# Altium PCB UmbilicalBoardV5.PcbDoc
Units mm, origin at the board's own origin, x right, y up, seen from the top; angles counter-clockwise.
Board outline 88.77 x 92.99 mm, 4 copper layers (Top Layer, GndPlane, PowerPlane, Bottom Layer), stack 0.107 mm thick; 24 components, 59 nets, 217 pads, 20 vias.
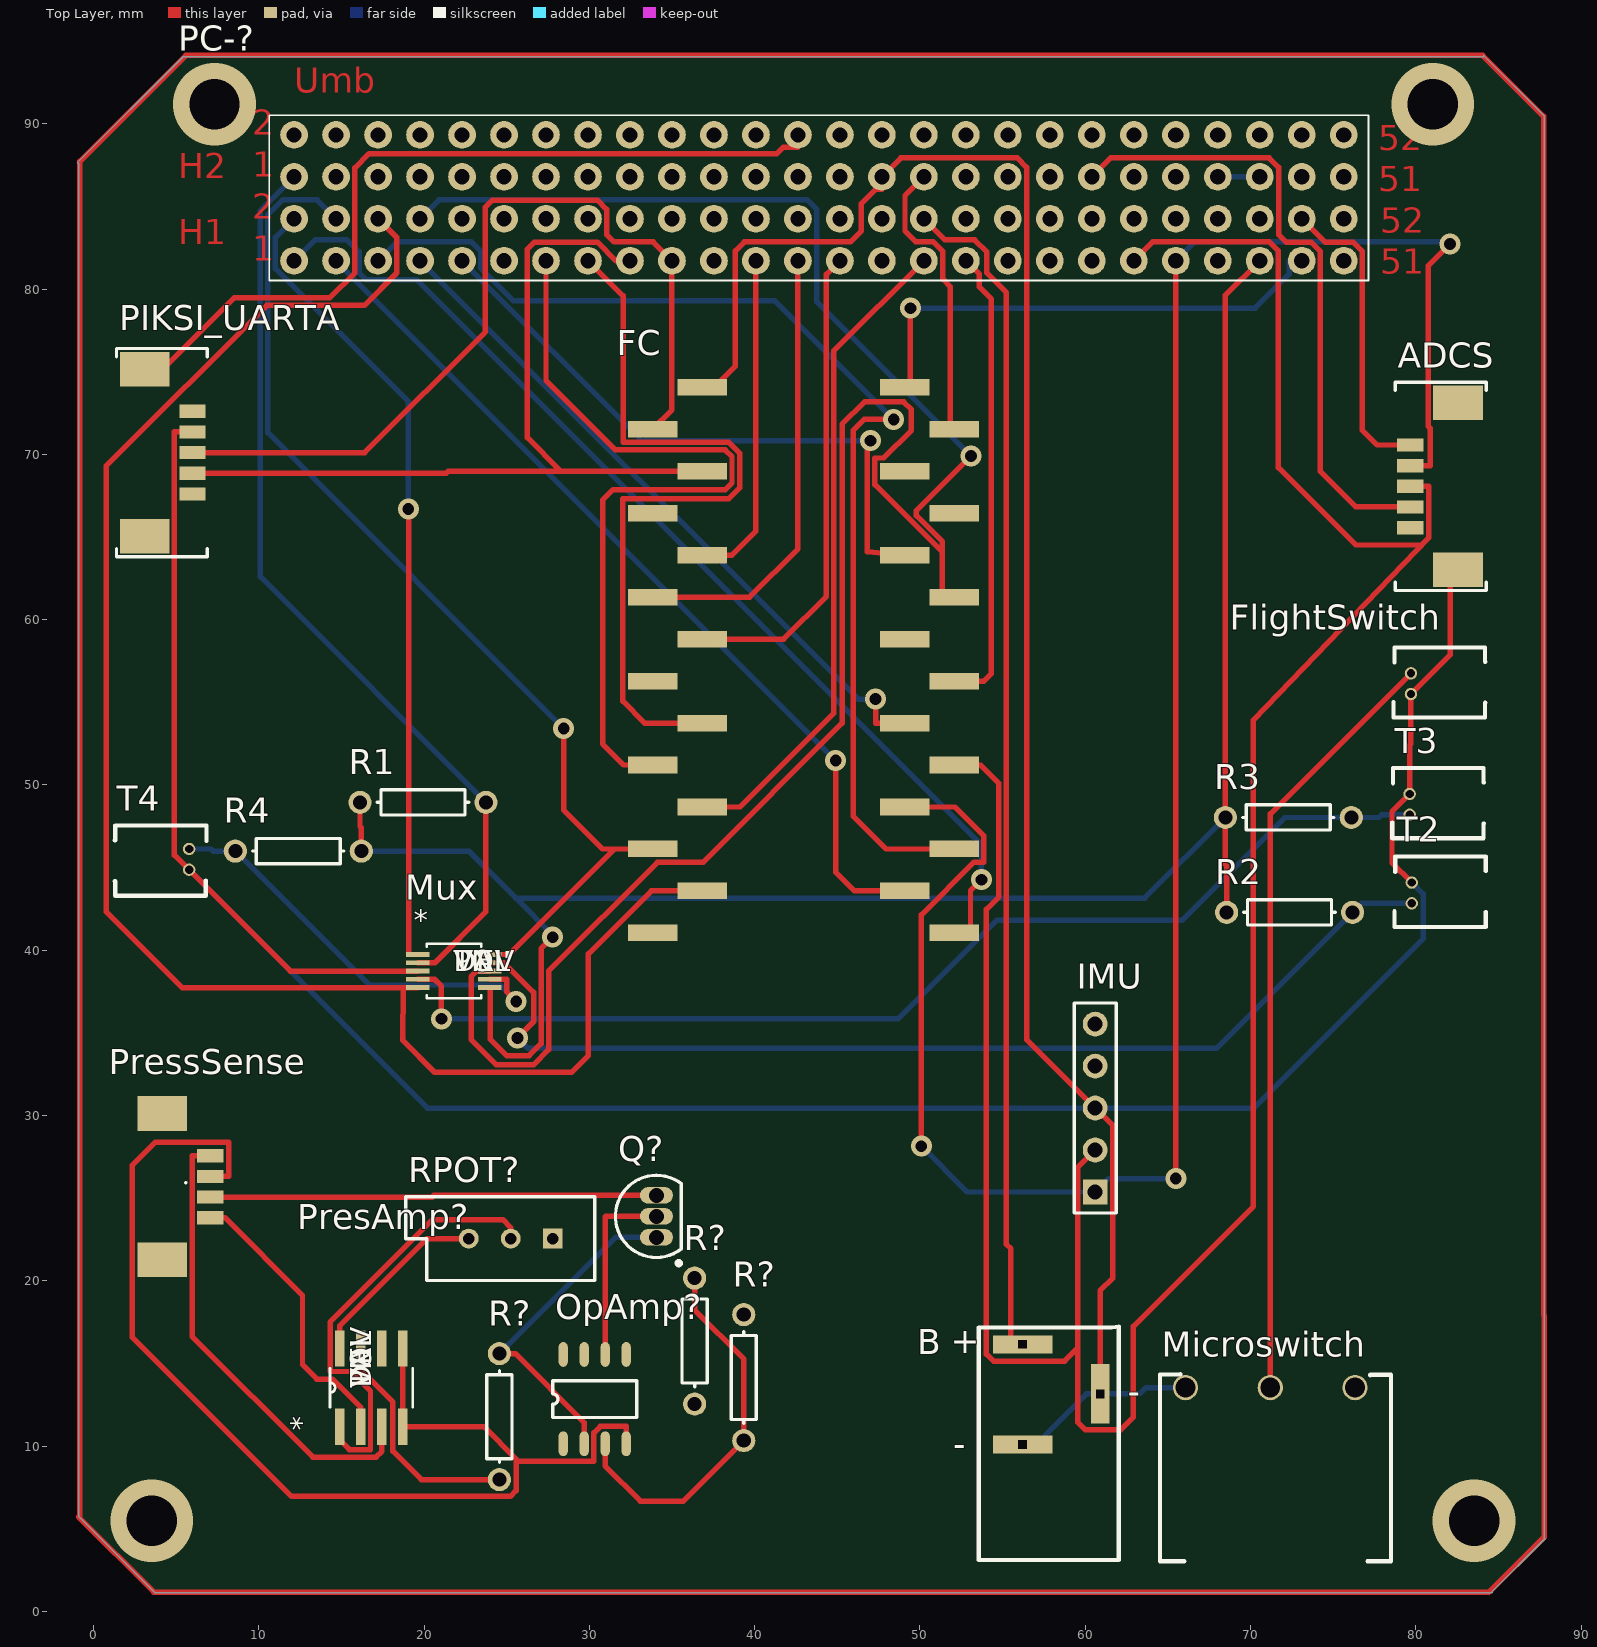
[diagram p0: Top Layer view]
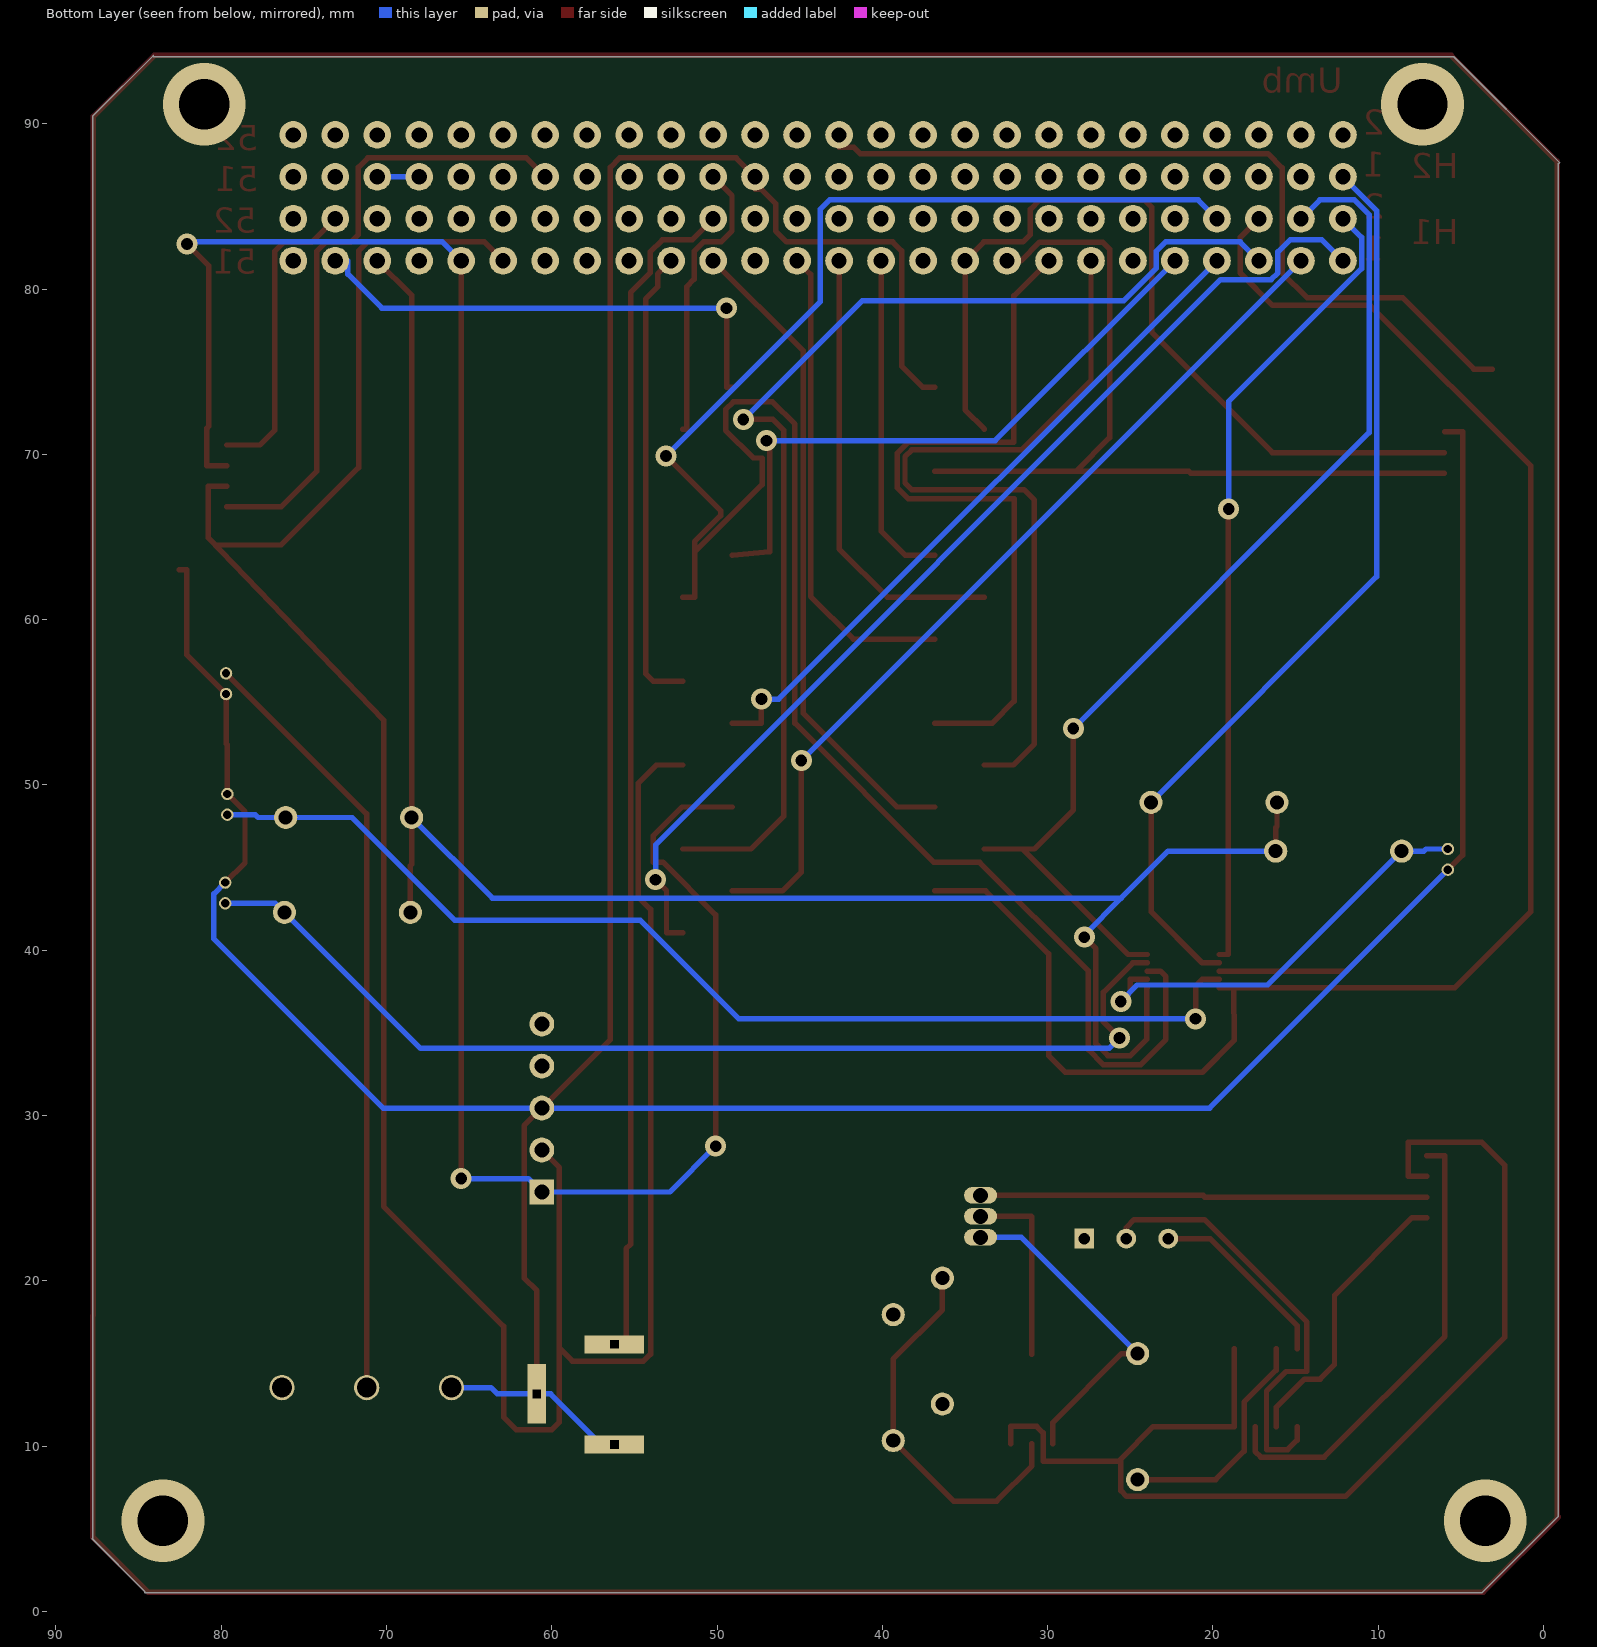
[diagram p1: Bottom Layer view, seen from below]
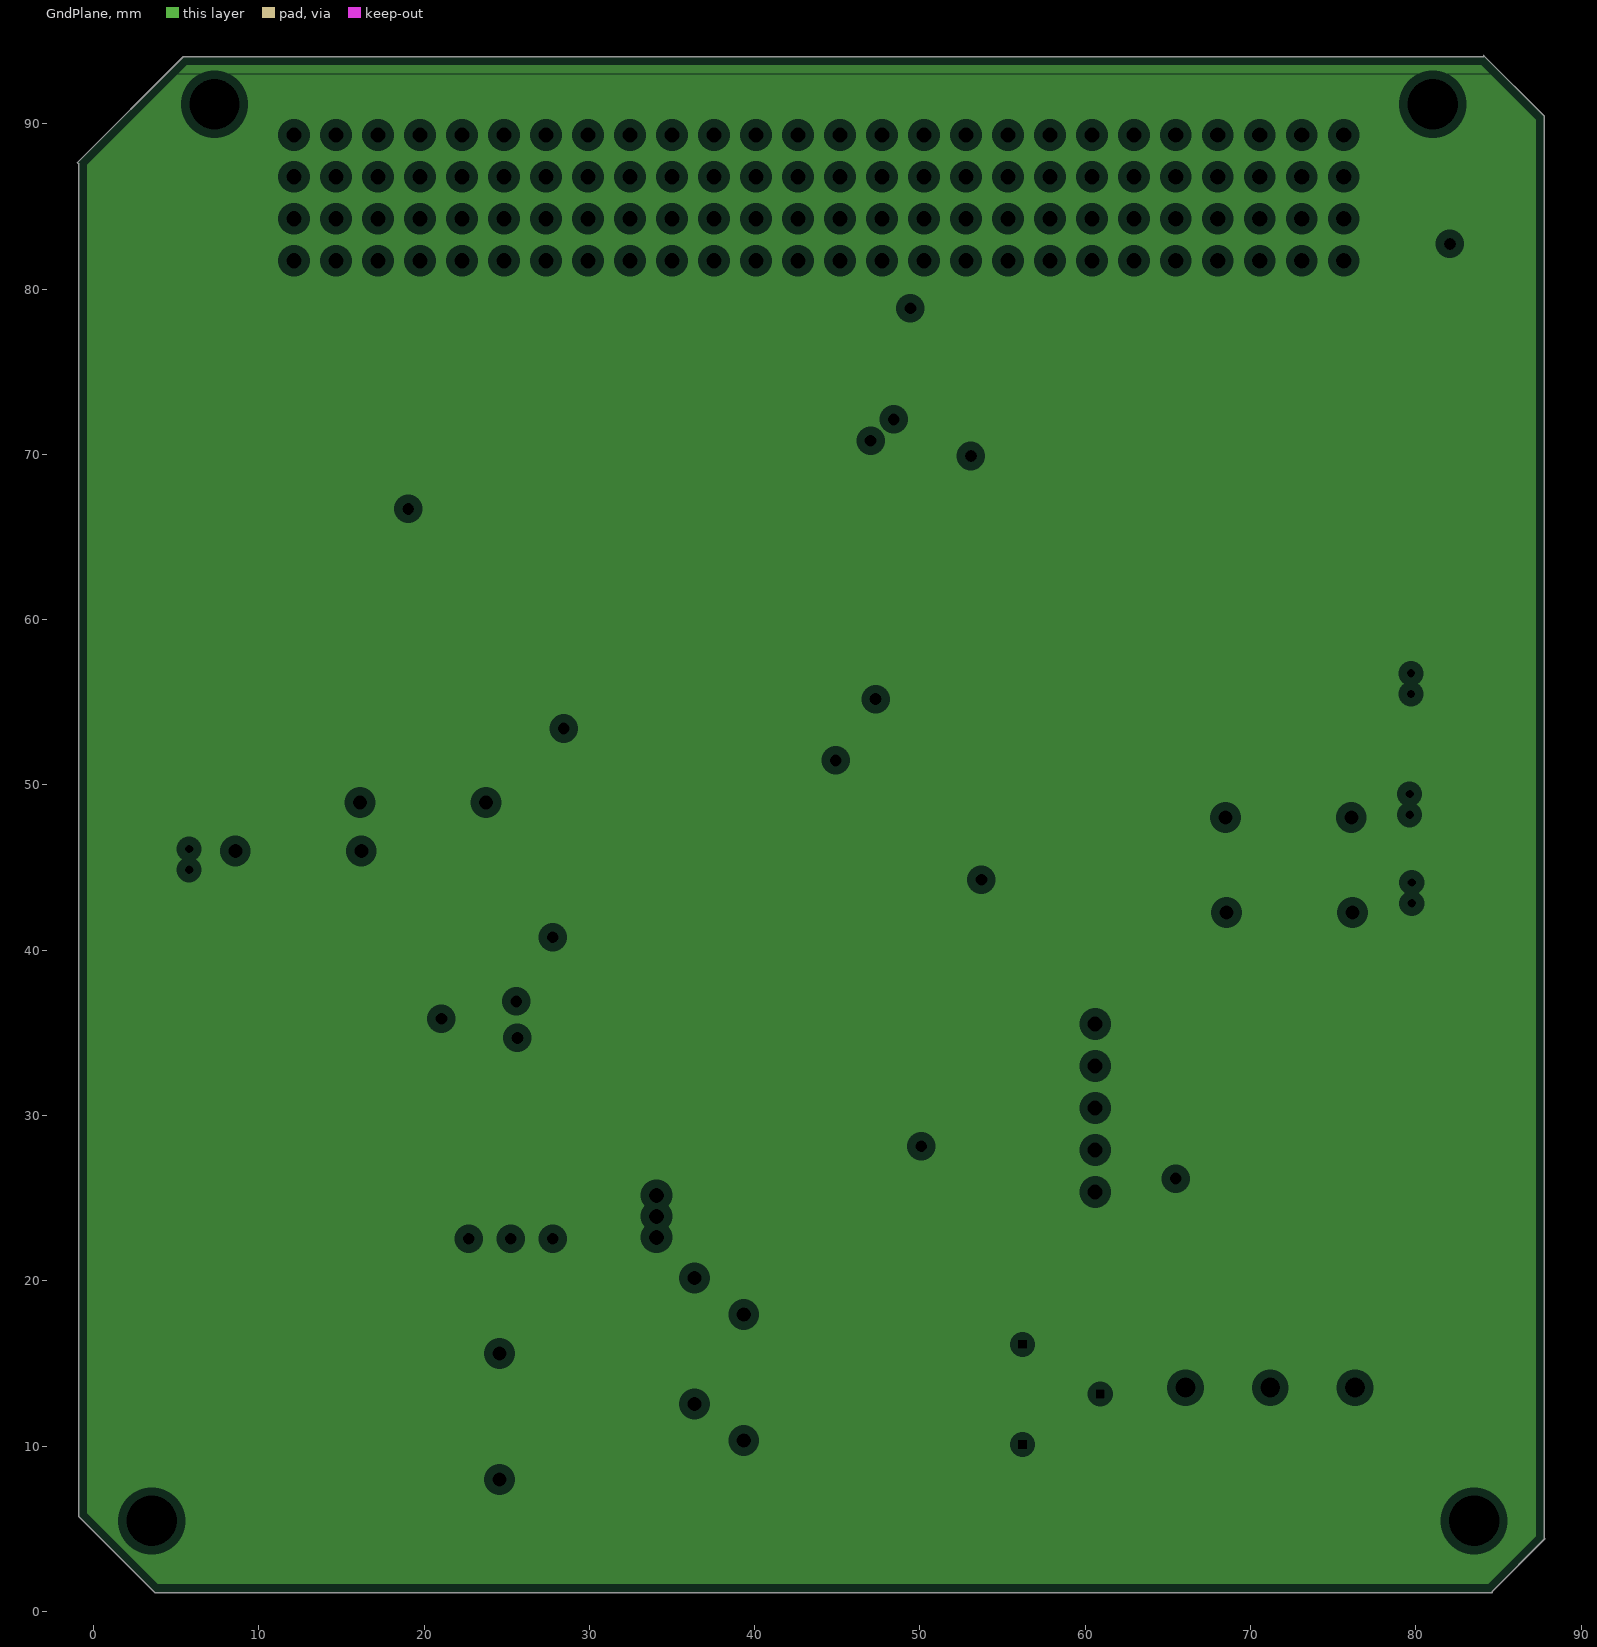
[diagram p2: GndPlane, clearances drawn from the general rule]
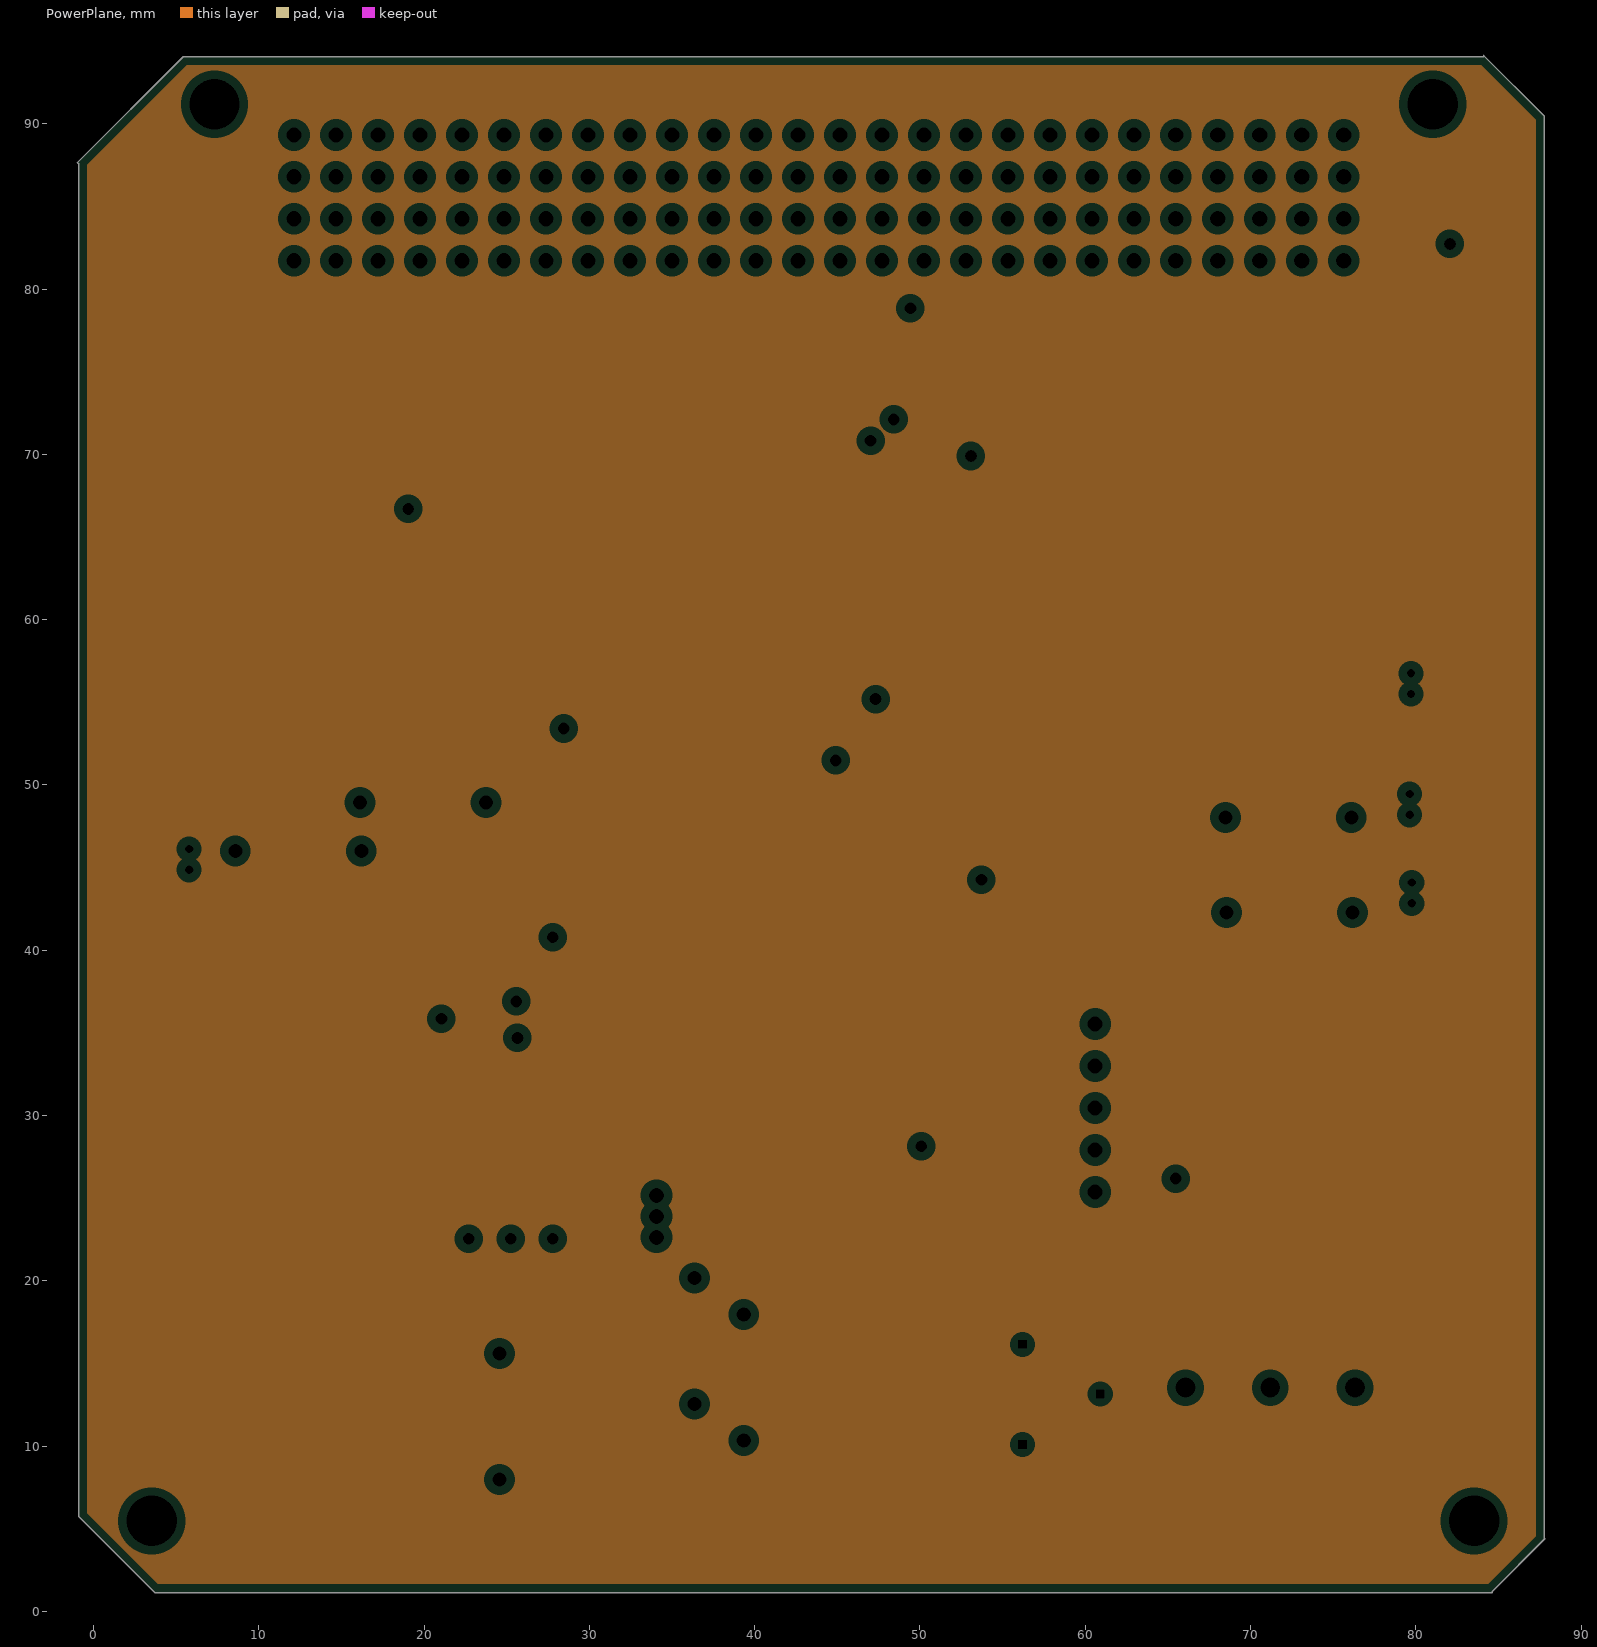
[diagram p3: PowerPlane, clearances drawn from the general rule]

## Layer stack, top to bottom
Top Solder: solder mask 0.0102, Solder Resist, Dk 3.5
Top Layer: signal copper 0.0356
GndPlane: plane copper 0.0178
PowerPlane: plane copper 0.0178
Bottom Layer: signal copper 0.0356
Bottom Solder: solder mask 0.0102, Solder Resist, Dk 3.5

## Board outline
84.099,94.132 87.782,90.449 87.782,4.42 87.808,4.394 84.633,1.219 84.633,1.143 3.708,1.143 -0.889,5.74 -0.889,87.579 -0.965,87.655 5.436,94.056 84.099,94.056

## Design rules (kind name [scope] priority, off if disabled: settings)
Clearance [All] p1: gap=0.254 ignorepadtopadclearanceinfootprint=FALSE except(0: Arc-Hole Track-Hole SMDPad-Hole THPad-Hole Via-Hole Fill-Hole Poly-Hole Region-Hole Text-Hole; 0.127: Track-Track Track-SMDPad Track-THPad SMDPad-SMDPad SMDPad-THPad THPad-THPad)
HoleSize [All] p1: absolutevalues=TRUE maxlimit=3.048 minlimit=0.025 maxpercent=80.000 minpercent=20.000
MinimumSolderMaskSliver [All] p1: minsoldermaskwidth=0.127
PlaneClearance [All] p1: clearance=0.508
PlaneConnect [All] p1: planeconnectstyle=Direct reliefexpansion=0.508 reliefentries=4 reliefconductorwidth=0.254 reliefairgap=0.254
PolygonConnect [All] p1: connectstyle=Direct reliefconductorwidth=0.254 reliefentries=4 polygonreliefangle="90 Angle" airgapwidth=0.254
RoutingVias [All] p1: holewidth=0.711 width=1.27 viastyle="Through Hole" minholewidth=0.711 minwidth=1.27 maxholewidth=0.711 maxwidth=1.27
SilkToSolderMaskClearance [IsPad] p1: minsilkscreentomaskgap=0.05 clearancetoexposedcopper=TRUE
SolderMaskExpansion [All] p1: expansion=0.102
Width [All] p1: maxlimit=0.559 minlimit=0.305 preferedwidth=0.33
25 further rules are at their usual default settings.

## Components (designator, comment, footprint, x,y, rotation, side; value= is the part's Value field where it differs from the comment)
ADCS "ADCS" "Molex Picoblade 5 Pin" 84.054,61.967 r90 top
B "Barrel_Jack" Barrel_Jack 56.209,10.107 r0 top
FC "Teensy 3.2 Headers" "Teensy 3.2 SMD Headers" 33.833,74.066 r0 top
FlightSwitch "RemoverBeforeFlightSwitch" "RemoverBeforeFlight Switch" 79.705,53.549 r90 top
IMU "Header 5" HDR1X5 60.604,25.375 r90 top
Microswitch "MicroSwitch" MicroSwitch_3pin 71.246,13.588 r180 top
Mux "MAX4634EUB+T" 21-0061L 21.806,38.743 r0 top value=Value
OpAmp? "UA741" UA741 28.423,10.145 r90 top
PC-? "PC-104" PC-104FOOTPRINT 12.141,81.712 r0 top
PIKSI_UARTA "PIKSI_UART Connector" "Molex Picoblade 5 Pin" 1.594,76.204 r270 top
PresAmp? "AD627ARZ" R_8 16.815,13.538 r90 top value=Value
PressSense "Connector 4POS Molex PicoBlade" 532610471 7.061,23.82 r0 top
Q? "2N3906" TO-92A 34.061,23.901 r0 top
R1 "Resistor" AXIAL-0.3 19.939,48.946 r0 top value=1K
R2 "Resistor" AXIAL-0.3 72.365,42.291 r0 top value=1K
R3 "Resistor" AXIAL-0.3 72.288,48.031 r0 top value=1K
R4 "Resistor" AXIAL-0.3 12.395,45.999 r180 top value=1K
R? "1000" AXIAL-0.3 39.345,14.148 r90 top value=Res
R? "1000" AXIAL-0.3 36.373,16.358 r90 top value=Res
R? "1000" AXIAL-0.3 24.562,11.786 r90 top value=Res
RPOT? "100K" VR5 25.248,22.555 r180 top value=1K
T2 "TempSensor1" "RemoverBeforeFlight Switch" 79.756,40.889 r90 top
T3 "TempSensor1" "RemoverBeforeFlight Switch" 79.629,46.249 r90 top
T4 "TempSensor2" "RemoverBeforeFlight Switch" 5.791,48.076 r270 top

## Footprints (in the part's own frame and the unit in brackets; to place one, negate y for a bottom-side part, rotate by r counter-clockwise, add the part's x,y. Pads: shape width x height; smd on the part's side, far side on the other; paste and mask are expansions set on the pad)
21-0061L [mil]
  rect 56x11 smd: 1(-85.5,39.37) 2(-85.5,19.69) 3(-85.5,0) 4(-85.5,-19.68) 5(-85.5,-39.37) 6(85.5,-39.37) 7(85.5,-19.68) 8(85.5,0) 9(85.5,19.69) 10(85.5,39.37)
  silkscreen extent -65,-65 134,65, body extent 0,0 10,10, height 10
532610471 [mm] "Connector 4POS Molex PicoBlade"
  rect 1.6x0.8 smd: 1(0,3.75) 2(0,2.5) 3(0,1.25) 4(0,0)
  rect 3x2.1 smd: ""(-2.9,-2.55) ""(-2.9,6.3)
  silkscreen extent -1.52,2.07 -1.42,2.17, body extent -4.71,-3.81 1.02,7.56, height 0.6
AXIAL-0.3 [mm] "Axial Device, Thru-Hole; 2 Leads; 0.3 in Pin Spacing"
  round 1.4 hole 0.85: 1(-3.81,0) 2(3.81,0)
  silkscreen extent -2.77,-0.76 2.77,0.76
Barrel_Jack [mm] "KLDX-0202-B"
  rect 3.6x1.1 hole 0.5 square: 0(0,0) 2(0,6.05)
  rect 1.1x3.6 hole 0.5 square: 1(4.7,3.05)
  silkscreen extent -2.65,-7 5.83,7.12
HDR1X5 [mm] "Connector; Header; 5 Position"
  rect 1.5x1.5 hole 0.9: 1(0,0)
  round 1.5 hole 0.9: 2(2.54,0) 3(5.08,0) 4(7.62,0) 5(10.16,0)
  silkscreen extent -1.27,-1.27 11.43,1.27
MicroSwitch_3pin [mm] "Omron Electronics Inc-EMC Div D2FS-FL-N-A1"
  round 1.524 hole 1.2: 1(-5.08,0.05) 2(0.05,0.05) 3(5.18,0.05)
  silkscreen extent -7.25,-0.77 6.73,10.55, body extent -7.25,-0.75 6.73,10.55
"Molex Picoblade 5 Pin" [mm] "Molex Picoblade Header, SMT, Right Angle  53261-0571"
  rect 0.8x1.6 smd: 0(3.6,4.4) 1(4.85,4.4) 2(6.1,4.4) 3(7.35,4.4) 4(8.6,4.4)
  rect 2.1x3 smd: 5(1.05,1.5) 6(11.15,1.5)
  silkscreen extent -0.2,-0.2 12.4,5.3, body extent 0.4,0 11.8,5.2, height 3.4
PC-104FOOTPRINT [mm]
  round 1.676 hole 0.914 mask+0.076: H1_1(0,0) H1_2(0,2.54) H1_3(2.54,0) H1_4(2.54,2.54) H1_5(5.08,0) H1_6(5.08,2.54) H1_7(7.62,0) H1_8(7.62,2.54) H1_9(10.16,0) H1_10(10.16,2.54) H1_11(12.7,0) H1_12(12.7,2.54) H1_13(15.24,0) H1_14(15.24,2.54) H1_15(17.78,0) H1_16(17.78,2.54) H1_17(20.32,0) H1_18(20.32,2.54) H1_19(22.86,0) H1_20(22.86,2.54) H1_21(25.4,0) H1_22(25.4,2.54) H1_23(27.94,0) H1_24(27.94,2.54) H1_25(30.48,0) H1_26(30.48,2.54) H1_27(33.02,0) H1_28(33.02,2.54) H1_29(35.56,0) H1_30(35.56,2.54) H1_31(38.1,0) H1_32(38.1,2.54) H1_33(40.64,0) H1_34(40.64,2.54) H1_35(43.18,0) H1_36(43.18,2.54) H1_37(45.72,0) H1_38(45.72,2.54) H1_39(48.26,0) H1_40(48.26,2.54) H1_41(50.8,0) H1_42(50.8,2.54) H1_43(53.34,0) H1_44(53.34,2.54) H1_45(55.88,0) H1_46(55.88,2.54) H1_47(58.42,0) H1_48(58.42,2.54) H1_49(60.96,0) H1_50(60.96,2.54) H1_51(63.5,0) H1_52(63.5,2.54) H2_1(0,5.08) H2_2(0,7.62) H2_3(2.54,5.08) H2_4(2.54,7.62) H2_5(5.08,5.08) H2_6(5.08,7.62) H2_7(7.62,5.08) H2_8(7.62,7.62) H2_9(10.16,5.08) H2_10(10.16,7.62) H2_11(12.7,5.08) H2_12(12.7,7.62) H2_13(15.24,5.08) H2_14(15.24,7.62) H2_15(17.78,5.08) H2_16(17.78,7.62) H2_17(20.32,5.08) H2_18(20.32,7.62) H2_19(22.86,5.08) H2_20(22.86,7.62) H2_21(25.4,5.08) H2_22(25.4,7.62) H2_23(27.94,5.08) H2_24(27.94,7.62) H2_25(30.48,5.08) H2_26(30.48,7.62) H2_27(33.02,5.08) H2_28(33.02,7.62) H2_29(35.56,5.08) H2_30(35.56,7.62) H2_31(38.1,5.08) H2_32(38.1,7.62) H2_33(40.64,5.08) H2_34(40.64,7.62) H2_35(43.18,5.08) H2_36(43.18,7.62) H2_37(45.72,5.08) H2_38(45.72,7.62) H2_39(48.26,5.08) H2_40(48.26,7.62) H2_41(50.8,5.08) H2_42(50.8,7.62) H2_43(53.34,5.08) H2_44(53.34,7.62) H2_45(55.88,5.08) H2_46(55.88,7.62) H2_47(58.42,5.08) H2_48(58.42,7.62) H2_49(60.96,5.08) H2_50(60.96,7.62) H2_51(63.5,5.08) H2_52(63.5,7.62)
  silkscreen extent -1.5,-1.19 65,8.81
R_8 [mil]
  rect 86x22 smd: 1(-93,75) 2(-93,25) 3(-93,-25) 4(-93,-75) 5(93,-75) 6(93,-25) 7(93,25) 8(93,75)
  silkscreen extent -46,-99 46,98
"RemoverBeforeFlight Switch" [mm] "Molex Picoblade Part Number: 53048-0210"
  round 0.75 hole 0.5: 1(1.95,0) 2(3.205,0)
  silkscreen extent 0.53,-4.5 4.78,1.05, body extent 0.53,-4.47 4.78,1.03, height 4.05
"Teensy 3.2 SMD Headers" [mm]
  rect 3x1 smd: 1(3,0) 2(0,-2.54) 3(3,-5.08) 4(0,-7.62) 5(3,-10.16) 6(0,-12.7) 7(3,-15.24) 8(0,-17.78) 9(3,-20.32) 10(0,-22.86) 11(3,-25.4) 12(0,-27.94) 13(3,-30.48) 14(0,-33.02) 20(18.24,-33.02) 21(15.24,-30.48) 22(18.24,-27.94) 23(15.24,-25.4) 24(18.24,-22.86) 25(15.24,-20.32) 26(18.24,-17.78) 27(15.24,-15.24) 28(18.24,-12.7) 29(15.24,-10.16) 30(18.24,-7.62) 31(15.24,-5.08) 32(18.24,-2.54) 33(15.24,0)
  body extent -1.09,-34.49 19.35,1.16, height 0.25
TO-92A [mm] "TO, Flat Index; 3 In-Line, Axial Leads; Body Dia. 4.5mm; Leads 0.51 x 0.48 mm (max)"
  oval 2x1 hole 0.9: 1(0,-1.27) 2(0,0) 3(0,1.27)
  silkscreen extent -2.48,-2.95 1.5,2.48, body extent -2.48,-2.5 1.5,2.5, height 6.86
UA741 [mm]
  oval 1.5x0.55 smd: 1(0,0) 2(0,-1.27) 3(0,-2.54) 4(0,-3.81) 5(5.4,-3.81) 6(5.4,-2.54) 7(5.4,-1.27) 8(5.4,0)
  silkscreen extent 1.59,-4.45 3.81,0.64
VR5 [mm] "Thru-Hole; 3 Leads"
  rect 1.2x1.2 hole 0.7: 1(-2.54,0)
  round 1.2 hole 0.7: 2(0,0) 3(2.54,0)
  silkscreen extent -5.08,-2.54 6.35,2.54

## Part data
ADCS: library part "PIKSI_UART Connector", "Molex Picoblade 53261-0571"
FlightSwitch: "53048-0210 Molex Picoblade"
IMU: "Header, 5-Pin", LatestRevisionDate=17-Jul-2002, LatestRevisionNote="Re-released for DXP Platform.", Publisher="Altium Limited"
Microswitch: "Omron Electronics Inc-EMC Div D2FS-FL-N-A1"
Mux PresAmp?: "Imported", Type=Type
  Mux: C="Copyright (C) 2015 Accelerated Designs. All rights reserved", Manufacturer_Part_Number=MAX4634EUB+T, RefDes=RefDes, Vendor="Maxim Integrated Products"
  PresAmp?: Manufacturer_Part_Number=AD627ARZ, RefDes=Refdes, Vendor=Vendor
PC-?: "ESQ-126-14-G-D (2 total needed)"
PIKSI_UARTA: "Molex Picoblade 53261-0571"
PressSense: library part 532610471
Q?: "PNP General Purpose Amplifier", ComponentLink1Description="Manufacturer Link", ComponentLink1URL=http://www.fairchildsemi.com/, ComponentLink2Description=Datasheet, ComponentLink2URL=http://www.fairchildsemi.com/ds/2N%2F2N3906.pdf, DatasheetVersion=1997, LatestRevisionDate=15-Jan-2003, LatestRevisionNote="PCB Footprint 'BCY-W3/D4.7' replaced", PackageDescription="TO, Flat Index; 3 In-Line, Axial Leads; Body Dia. 4.5mm; Leads 0.51 x 0.48 mm (max)", PackageReference=TO-92A, PackageVersion=Sep-1998, Published=8-Jun-2000, Publisher="Altium Limited"
R1 R2 R3 R4: library part Res1, LatestRevisionDate=17-Jul-2002, LatestRevisionNote="Re-released for DXP Platform.", PackageDescription="Axial Device, Thru-Hole; 2 Leads; 0.3 in Pin Spacing", PackageReference=AXIAL-0.3, Published=8-Jun-2000, Publisher="Altium Limited"
R? R? R?: library part Res1, "Resistor- 696-1552-ND", LatestRevisionDate=17-Jul-2002, LatestRevisionNote="Re-released for DXP Platform.", PackageDescription="Axial Device, Thru-Hole; 2 Leads; 0.3 in Pin Spacing", PackageReference=AXIAL-0.3, Published=8-Jun-2000, Publisher="Altium Limited"
RPOT?: library part RPot, "Potentiometer", LatestRevisionDate=17-Jul-2002, LatestRevisionNote="Re-released for DXP Platform.", PackageDescription="Variable Resistor, Thru-Hole; 3 Leads", PackageReference=VR5, Published=8-Jun-2000, Publisher="Altium Limited", Set Position=0.5, Sim Note="Enter the Resistance value and the set point into parameter fields."
T2 T3 T4: library part RemoverBeforeFlightSwitch, "53048-0210 Molex Picoblade"

## Via types
v1: diameter 1.27, hole 0.711, Top Layer to Bottom Layer, 16 vias
v2: diameter 5, hole 3.048, Top Layer to Bottom Layer, 4 vias

## Nets (pads, with @x,y where several pads share a name; then routed paths per layer and width w, separated by ;. In a path a pad name is that pad's centre, name@x,y a point inside that pad or via, vN(x,y) a via of type N, cw(c..) or ccw(c..) an arc to the next point about the centre after c; other vN are vias at no path point)
3.3_Valves135: PC-?.H2_28
3.3_Valves246: PC-?.H2_27
5_ADCS: ADCS.4 PC-?.H1_50 | length 18.6
  Top Layer w0.33: PC-?.H1_50 74.511,82.842 76.212,82.842 76.771,82.283 76.771,71.45 77.655,70.567 ADCS.4
5_IMU: PC-?.H2_25
5_Valves: PC-?.H1_48
5V_BattChargeIn: B.2 PC-?.H1_32 | length 72
  Top Layer w0.33: PC-?.H1_32 51.511,82.982 53.314,82.982 54.051,82.245 54.051,80.975 55.237,79.789 55.237,22.208 55.499,21.945 55.499,16.157 B.2
5V_IMU: IMU.4
5V_Piksi: PC-?.H2_26 PIKSI_UARTA.5 | length 49.6
  Top Layer w0.33: PIKSI_UARTA.5 4.212,75.154 8.534,79.476 14.313,79.476 15.811,80.975 15.811,87.325 16.675,88.189 41.351,88.189 41.732,88.57 42.621,88.57 PC-?.H2_26
5V_Teensy1: FC.33 PC-?.H1_49 | length 30.5
  Top Layer w0.33: FC.33 49.428,74.066 v1(49.428,78.841)
  Bottom Layer w0.33: v1(49.428,78.841) 70.282,78.841 72.339,80.899 72.339,81.712 PC-?.H1_49
5V_Teensy2: PC-?.H1_51
5V_TempSensors: Mux.6 PC-?.H1_47 R1.1 R2.1 R3.1 R4.1 | length 115.7
  Top Layer w0.33: R1.1 16.129,47.498 16.205,47.422 R4.1 ; Mux.6 24.003,37.743 24.003,34.62 24.993,33.629 26.365,33.629 27.089,34.354 27.089,40.094 v1(27.787,40.792) ; R2.1 68.555,45.11 68.478,45.186 R3.1 68.478,79.629 PC-?.H1_47
  Bottom Layer w0.33: R4.1 22.707,45.999 25.552,43.154 ; v1(27.787,40.792) 27.787,40.919 25.552,43.154 ; R3.1 63.601,43.154 25.552,43.154
24V: ADCS.1 PC-?.H2_39 | length 38.7
  Top Layer w0.33: PC-?.H2_39 61.544,87.935 71.132,87.935 71.704,87.363 71.704,83.287 72.149,82.842 73.672,82.842 74.231,82.283 74.231,68.963 76.378,66.817 ADCS.1
24V_1: PC-?.H2_49
24V_2: PC-?.H2_50
24V_3: PC-?.H2_51
24V_4: PC-?.H2_52
24V_SAH_enable: FC.11 PC-?.H1_31 | length 39.9
  Top Layer w0.33: FC.11 39.119,48.666 44.799,54.346 44.799,76.27 PC-?.H1_31
AGND: FC.32 PC-?.H2_31 | length 17.7
  Top Layer w0.33: PC-?.H2_31 49.098,85.649 49.098,83.515 49.758,82.855 50.812,82.855 51.384,82.283 51.384,80.594 51.841,80.137 51.841,71.526 FC.32
ANALOGGND: OpAmp?.4 PresAmp?.4 PresAmp?.5 PressSense.2 | length 71.2
  Top Layer w0.33: PressSense.2 8.179,26.32 8.179,28.372 3.734,28.372 2.362,27 2.362,16.586 11.989,6.959 25.222,6.959 25.578,7.315 25.578,9.093 ; PresAmp?.5 PresAmp?.4 23.622,11.176 25.578,9.22 25.578,9.093 ; OpAmp?.4 32.233,11.201 30.67,11.201 30.277,10.807 30.277,9.093 25.578,9.093
DGND: ADCS.5 B.0 B.1 FC.1 FlightSwitch.1 IMU.3 Microswitch.3 Mux.3 PC-?.H2_29 PIKSI_UARTA.1 T2.2 T3.2 T4.2 | length 273.3
  Top Layer w0.33: PIKSI_UARTA.1 4.902,71.354 4.902,45.761 T4.2 11.92,38.743 Mux.3 ; FC.1 37.566,74.066 38.836,75.336 38.836,82.308 39.382,82.855 45.796,82.855 46.456,83.515 46.456,85.166 47.32,86.03 47.701,86.03 PC-?.H2_29 48.844,87.935 55.892,87.935 56.464,87.363 56.464,34.595 IMU.3 61.671,29.388 61.671,20.167 60.909,19.406 B.1 ; T2.2 78.562,45.288 78.562,48.387 T3.2 79.629,52.425 79.705,52.502 FlightSwitch.1 82.093,57.886 82.093,63.017 ADCS.5
  Bottom Layer w0.33: T4.2 20.208,30.455 IMU.3 70.206,30.455 80.442,40.691 80.442,43.409 T2.2 ; B.0 57.023,10.107 60.073,13.157 B.1 63.297,13.157 63.678,13.538 Microswitch.3
Docking_BW: FC.6 PC-?.H1_25 | length 27.4
  Top Layer w0.33: FC.6 39.7,61.366 42.621,64.288 PC-?.H1_25
Docking_en: FC.7 PC-?.H1_27 | length 29.2
  Top Layer w0.33: FC.7 41.757,58.826 44.342,61.411 44.342,80.892 PC-?.H1_27
DockingFW: FC.5 PC-?.H1_23 | length 20.2
  Top Layer w0.33: FC.5 38.633,63.906 40.081,65.354 PC-?.H1_23
EPS_RX: PC-?.H2_38
EPS_TX: PC-?.H2_36
GND: RPOT?.1
Linkstar_RX: FC.9 PC-?.H1_15 | length 46.2
  Top Layer w0.33: PC-?.H1_15 32.041,79.592 32.041,70.734 38.43,70.734 39.09,70.074 39.09,67.97 38.43,67.31 32.029,67.31 32.029,55.067 33.35,53.746 FC.9
Linkstar_TX: FC.10 PC-?.H1_13 | length 48.5
  Top Layer w0.33: PC-?.H1_13 27.381,74.479 31.583,70.277 38.219,70.277 38.633,69.862 38.633,68.275 38.227,67.869 31.445,67.869 30.81,67.234 30.81,52.476 32.08,51.206 FC.10
mux1: Mux.2 PC-?.H2_1 R1.2 | length 56.4
  Top Layer w0.33: Mux.2 20.65,39.243 23.749,42.342 R1.2
  Bottom Layer w0.33: PC-?.H2_1 10.097,84.747 10.097,62.598 R1.2
mux2: Mux.9 R2.2 T2.1 | length 64.6
  Top Layer w0.33: Mux.9 24.841,39.243 26.632,37.452 26.632,35.674 v1(25.654,34.696)
  Bottom Layer w0.33: v1(25.654,34.696) 26.289,34.061 67.945,34.061 R2.2 76.723,42.839 T2.1
mux3: Mux.4 R3.2 T3.1 | length 67.3
  Top Layer w0.33: Mux.4 20.65,38.243 21.056,37.837 v1(21.056,35.852)
  Bottom Layer w0.33: v1(21.056,35.852) 48.679,35.852 54.635,41.808 65.862,41.808 72.085,48.031 R3.2 77.775,48.031 77.942,48.199 T3.1
mux4: Mux.7 R4.2 T4.1 | length 26.2
  Top Layer w0.33: Mux.7 24.993,38.243 24.993,37.49 v1(25.578,36.906)
  Bottom Layer w0.33: T4.1 7.112,46.126 7.239,45.999 R4.2 16.688,37.897 24.587,37.897 v1(25.578,36.906)
NetFlightSwitch_2: FlightSwitch.2 Microswitch.2 | length 46.7
  Top Layer w0.33: Microswitch.2 71.196,48.245 FlightSwitch.2
NetOpAmp?_2: OpAmp?.2 Q?.1 R?.2@24.562,15.596 | length 20.6
  Top Layer w0.33: R?.2@24.562,15.596 25.527,15.596 29.693,11.43 OpAmp?.2
  Bottom Layer w0.33: R?.2@24.562,15.596 31.598,22.631 Q?.1
NetOpAmp?_3: OpAmp?.3 R?.1@39.345,10.338 R?.2@36.373,20.168 | length 23.2
  Top Layer w0.33: OpAmp?.3 30.963,8.813 33.096,6.68 35.687,6.68 39.345,10.338 39.345,15.265 36.373,18.237 R?.2@36.373,20.168
NetOpAmp?_6: OpAmp?.6 Q?.2 | length 11.4
  Top Layer w0.33: OpAmp?.6 30.963,23.876 30.988,23.901 Q?.2
NetPresAmp?_1: PresAmp?.1 RPOT?.2 | length 26.7
  Top Layer w0.33: PresAmp?.1 14.91,10.363 15.481,9.792 16.751,9.792 16.764,9.804 16.764,13.335 15.582,14.516 14.325,14.516 14.325,17.5 20.523,23.698 24.777,23.698 25.248,23.228 RPOT?.2
NetPresAmp?_2: PresAmp?.2 PressSense.4 | length 17.5
  Top Layer w0.33: PressSense.4 7.95,23.82 12.649,19.121 12.649,14.935 13.525,14.059 14.465,14.059 16.18,12.344 PresAmp?.2
NetPresAmp?_3: PresAmp?.3 PressSense.1 | length 28.2
  Top Layer w0.33: PressSense.1 5.969,27.57 5.969,16.637 13.271,9.335 17.098,9.335 17.45,9.686 PresAmp?.3
NetPresAmp?_6: PresAmp?.6
NetPresAmp?_7: PresAmp?.7 R?.1@24.562,7.976 | length 14.2
  Top Layer w0.33: PresAmp?.7 16.18,14.592 18.11,12.662 18.11,9.703 19.837,7.976 R?.1@24.562,7.976
NetPresAmp?_8: PresAmp?.8 RPOT?.3 | length 11.4
  Top Layer w0.33: PresAmp?.8 14.91,17.297 20.168,22.555 RPOT?.3
NetPressSense_3: PressSense.3 Q?.3 | length 27
  Top Layer w0.33: PressSense.3 20.498,25.07 20.599,25.171 Q?.3
Piksi_RX: FC.2 PC-?.H1_19 PIKSI_UARTA.2 | length 52.8
  Top Layer w0.33: PIKSI_UARTA.2 16.408,70.104 23.711,77.407 23.711,84.951 24.142,85.382 30.492,85.382 31.051,84.823 31.051,83.299 31.496,82.855 33.858,82.855 PC-?.H1_19 35.001,72.695 FC.2
Piksi_TX: FC.3 PC-?.H1_17 PIKSI_UARTA.3 | length 52
  Top Layer w0.33: PIKSI_UARTA.3 21.336,68.854 21.468,68.986 28.27,68.986 ; PC-?.H1_17 31.623,81.712 30.492,82.842 26.682,82.842 26.251,82.411 26.251,71.005 28.27,68.986 ; FC.3 28.27,68.986
Pressure1: FC.26 PC-?.H1_33 | length 28.1
  Top Layer w0.33: FC.26 53.873,56.286 54.322,56.735 54.322,79.396 53.594,80.124 53.594,80.899 PC-?.H1_33
Teensy2_Reset: FC.4
Teensy2_SCL: ADCS.3 FC.23 IMU.1 PC-?.H1_43 | length 130.9
  Top Layer w0.33: FC.23 52.117,48.666 53.865,46.919 53.865,45.334 53.284,45.334 50.089,42.138 v1(50.089,28.143) ; v1(65.481,26.187) 65.481,79.959 PC-?.H1_43 ; ADCS.3 80.873,69.317 80.873,71.577 80.746,71.704 80.746,81.407 v1(82.067,82.728)
  Bottom Layer w0.33: v1(50.089,28.143) 52.857,25.375 IMU.1 61.417,26.187 v1(65.481,26.187) ; PC-?.H1_43 66.624,82.855 81.94,82.855 v1(82.067,82.728)
Teensy2_SDA: ADCS.2 FC.24 IMU.2 PC-?.H1_41 | length 163.3
  Top Layer w0.33: FC.24 53.67,51.206 54.779,50.097 54.779,43.223 54.026,42.469 54.026,15.57 54.457,15.138 58.75,15.138 59.537,15.926 ; IMU.2 59.537,26.848 59.537,15.926 ; PC-?.H1_41 64.084,82.855 71.145,82.855 71.691,82.308 71.691,69.202 76.378,64.516 80.34,64.516 80.772,64.948 ; ADCS.2 80.772,68.067 80.772,64.948 ; 59.537,15.926 59.537,11.455 59.995,10.998 62.154,10.998 62.916,11.76 62.916,17.246 70.18,24.511 70.18,53.924 80.772,64.948
TempMuxA0: Mux.1 PC-?.H1_2 | length 48.9
  Top Layer w0.33: v1(19.05,66.7) 19.075,66.675 19.075,39.743 Mux.1
  Bottom Layer w0.33: PC-?.H1_2 11.011,83.122 11.011,81.241 19.05,73.203 v1(19.05,66.7)
TempMuxA1: FC.12 Mux.10 PC-?.H1_4 | length 64.9
  Top Layer w0.33: Mux.10 25.136,39.743 31.52,46.126 ; v1(28.448,53.416) 28.448,48.489 30.81,46.126 31.52,46.126 ; FC.12 31.52,46.126
  Bottom Layer w0.33: PC-?.H1_4 13.538,85.395 11.442,85.395 10.554,84.506 10.554,71.31 v1(28.448,53.416)
TempMuxEN: FC.13 Mux.5 PC-?.H1_6 | length 104.1
  Top Layer w0.33: PC-?.H1_6 18.351,83.122 18.351,80.975 16.396,79.019 10.49,79.019 0.787,69.316 0.787,42.316 5.36,37.743 18.732,37.743 ; Mux.5 18.732,37.743 ; FC.13 33.756,43.586 29.946,39.776 29.946,33.629 28.93,32.613 20.65,32.613 18.72,34.544 18.732,37.743
TempMuxRead: FC.28 Mux.8 PC-?.H1_8 | length 128.8
  Top Layer w0.33: Mux.8 23.19,38.743 22.854,38.407 22.854,34.601 24.368,33.086 26.648,33.086 27.546,33.985 27.546,38.748 34.112,45.313 36.881,45.313 45.302,53.735 45.302,71.83 46.649,73.177 49.022,73.177 49.479,72.72 49.479,71.45 47.808,69.779 47.281,69.779 47.281,68.173 51.359,64.095 ; FC.28 51.359,61.366 51.359,64.095 ; v1(53.086,69.901) 49.784,66.599 49.784,66.294 51.359,64.719 51.359,64.095
  Bottom Layer w0.33: PC-?.H1_8 20.904,85.395 43.192,85.395 43.764,84.823 43.764,79.222 v1(53.086,69.901)
Valve1: FC.20 PC-?.H1_1 | length 64.6
  Top Layer w0.33: FC.20 53.06,41.046 53.06,43.612 v1(53.721,44.272)
  Bottom Layer w0.33: PC-?.H1_1 13.411,82.982 15.341,82.982 16.078,82.245 16.078,80.975 16.484,80.569 19.532,80.569 53.721,46.38 v1(53.721,44.272)
Valve2: FC.21 PC-?.H1_3 | length 54.1
  Top Layer w0.33: v1(44.907,51.486) 44.907,44.729 46.05,43.586 FC.21
  Bottom Layer w0.33: PC-?.H1_3 v1(44.907,51.486)
Valve3: FC.22 PC-?.H1_5 | length 69.7
  Top Layer w0.33: v1(48.412,72.11) 46.621,72.11 45.961,71.45 45.961,48.12 47.955,46.126 FC.22
  Bottom Layer w0.33: PC-?.H1_5 18.364,82.855 22.872,82.855 23.444,82.283 23.444,81.254 25.393,79.305 41.217,79.305 v1(48.412,72.11)
Valve4: FC.25 PC-?.H1_7 | length 41.7
  Top Layer w0.33: v1(47.32,55.194) 47.32,53.746 FC.25
  Bottom Layer w0.33: PC-?.H1_7 46.279,55.194 v1(47.32,55.194)
Valve5: FC.29 PC-?.H1_9 | length 38.3
  Top Layer w0.33: v1(47.015,70.828) 46.823,70.636 46.823,64.098 FC.29
  Bottom Layer w0.33: PC-?.H1_9 33.185,70.828 v1(47.015,70.828)
VBatt: PC-?.H2_45 PC-?.H2_47 | length 2.5
  Bottom Layer w0.33: PC-?.H2_45 PC-?.H2_47
pads on no net: ADCS.0 ADCS.6 FC.8 FC.14 FC.27 FC.30 FC.31 IMU.5 Microswitch.1 OpAmp?.1 OpAmp?.5 OpAmp?.7 OpAmp?.8 PC-?.H1_10 PC-?.H1_11 PC-?.H1_12 PC-?.H1_14 PC-?.H1_16 PC-?.H1_18 PC-?.H1_20 PC-?.H1_21 PC-?.H1_22 PC-?.H1_24 PC-?.H1_26 PC-?.H1_28 PC-?.H1_29 PC-?.H1_30 PC-?.H1_34 PC-?.H1_35 PC-?.H1_36 PC-?.H1_37 PC-?.H1_38 PC-?.H1_39 PC-?.H1_40 PC-?.H1_42 PC-?.H1_44 PC-?.H1_45 PC-?.H1_46 PC-?.H1_52 PC-?.H2_2 PC-?.H2_3 PC-?.H2_4 PC-?.H2_5 PC-?.H2_6 PC-?.H2_7 PC-?.H2_8 PC-?.H2_9 PC-?.H2_10 PC-?.H2_11 PC-?.H2_12 PC-?.H2_13 PC-?.H2_14 PC-?.H2_15 PC-?.H2_16 PC-?.H2_17 PC-?.H2_18 PC-?.H2_19 PC-?.H2_20 PC-?.H2_21 PC-?.H2_22 PC-?.H2_23 PC-?.H2_24 PC-?.H2_30 PC-?.H2_32 PC-?.H2_33 PC-?.H2_34 PC-?.H2_35 PC-?.H2_37 PC-?.H2_40 PC-?.H2_41 PC-?.H2_42 PC-?.H2_43 PC-?.H2_44 PC-?.H2_46 PC-?.H2_48 PIKSI_UARTA.0 PIKSI_UARTA.4 PIKSI_UARTA.6 PressSense. R?.1@36.373,12.548 R?.2@39.345,17.958
copper on no net: | length 352.7
  Top Layer w0.33: -0.889,5.715 3.658,1.168 84.43,1.168 87.681,4.42 87.759,4.497 87.759,17.888 87.732,17.915 87.732,90.449 84.049,94.132 5.588,94.132 -0.813,87.732 -0.813,5.664
  other v2: 3.526,5.479 83.526,5.479 7.326,91.179 81.026,91.179

## Polygon pours and split planes (outlines as drawn)
no net on GndPlane (split plane): 87.272,90.238 87.272,4.58 84.345,1.653 3.92,1.653 -0.379,5.952 -0.379,87.52 5.647,93.546 83.964,93.546
no net on PowerPlane (split plane): 87.272,90.238 87.272,4.58 84.345,1.653 3.92,1.653 -0.379,5.952 -0.379,87.52 5.647,93.546 83.964,93.546

## Other copper
GndPlane (plane layer: these items are gaps in the copper):
  lines w0: 4.978,93.04 86.919,93.04
  lines w0.254: 88.443,42.57 88.697,42.824

## Silkscreen, mask and mechanical layers (free items; w line width, h text height)
Top Overlay:
  rectangle: 100.686,18.821 105.562,23.266
  text "Cornell  / Umbilical Board  / Rev 2.1" at 100.813,23.698 h1.52
Mechanical 1:
  rectangle: 59.207,24.206 84.607,36.906
Mechanical 2:
  text "Check PC104 and hole placements then lock" at 103.81,65.837 h1.52
Drill Drawing:
  text ".Legend" at 70.485,-3.708 h1.52

## Text inside footprints (layer, text, board x,y; h text height)
B: Top Overlay "-" at 52.009,9.382 h1.52; Top Overlay "-" at 62.584,12.557 h1.52; Top Overlay "+" at 51.859,15.607 h1.52
Mux: Top Overlay "TOL" at 21.806,38.743 h1.27; Top Overlay "VAL" at 21.806,38.743 h1.27; Top Overlay "DEV" at 21.806,38.743 h1.27; Top Overlay "PN" at 21.806,38.743 h1.27; Top Overlay "*" at 19.38,41.165 h1.27; Dimensions "RefDes2" at 21.806,38.743 h1.27; Dimensions "*" at 20.663,40.191 h1.27
PC-?: Top Layer "52" at 77.741,88.412 h1.52; Top Layer "51" at 77.741,85.912 h1.52; Top Layer "52" at 77.841,83.412 h1.52; Top Layer "51" at 77.841,80.912 h1.52; Top Layer "2" at 9.601,89.332 h1.52; Top Layer "1" at 9.601,86.792 h1.52; Top Layer "2" at 9.601,84.252 h1.52; Top Layer "1" at 9.601,81.712 h1.52; Top Layer "H2" at 5.141,86.712 h1.52; Top Layer "H1" at 5.141,82.712 h1.52; Top Layer "Umb" at 12.141,91.872 h1.52; Mechanical 1 "J1" at 51.548,85.606 h0.76
PresAmp?: Top Overlay "TOL" at 16.815,13.538 h1.27 r90; Top Overlay "VAL" at 16.815,13.538 h1.27 r90; Top Overlay "DEV" at 16.815,13.538 h1.27 r90; Top Overlay "PN" at 16.815,13.538 h1.27 r90; Top Overlay "*" at 13.208,10.922 h1.27 r90; Dimensions "RefDes2" at 16.815,13.538 h1.27 r90; Dimensions "*" at 13.208,10.922 h1.27 r90